# Altium PCB PCB1.PcbDoc
Units mil, origin at the board's own origin, x right, y up, seen from the top; angles counter-clockwise.
Board outline 2755.91 x 2755.91 mil, 2 copper layers (Top Layer, Bottom Layer); 57 components, 61 nets, 243 pads, 102 vias.
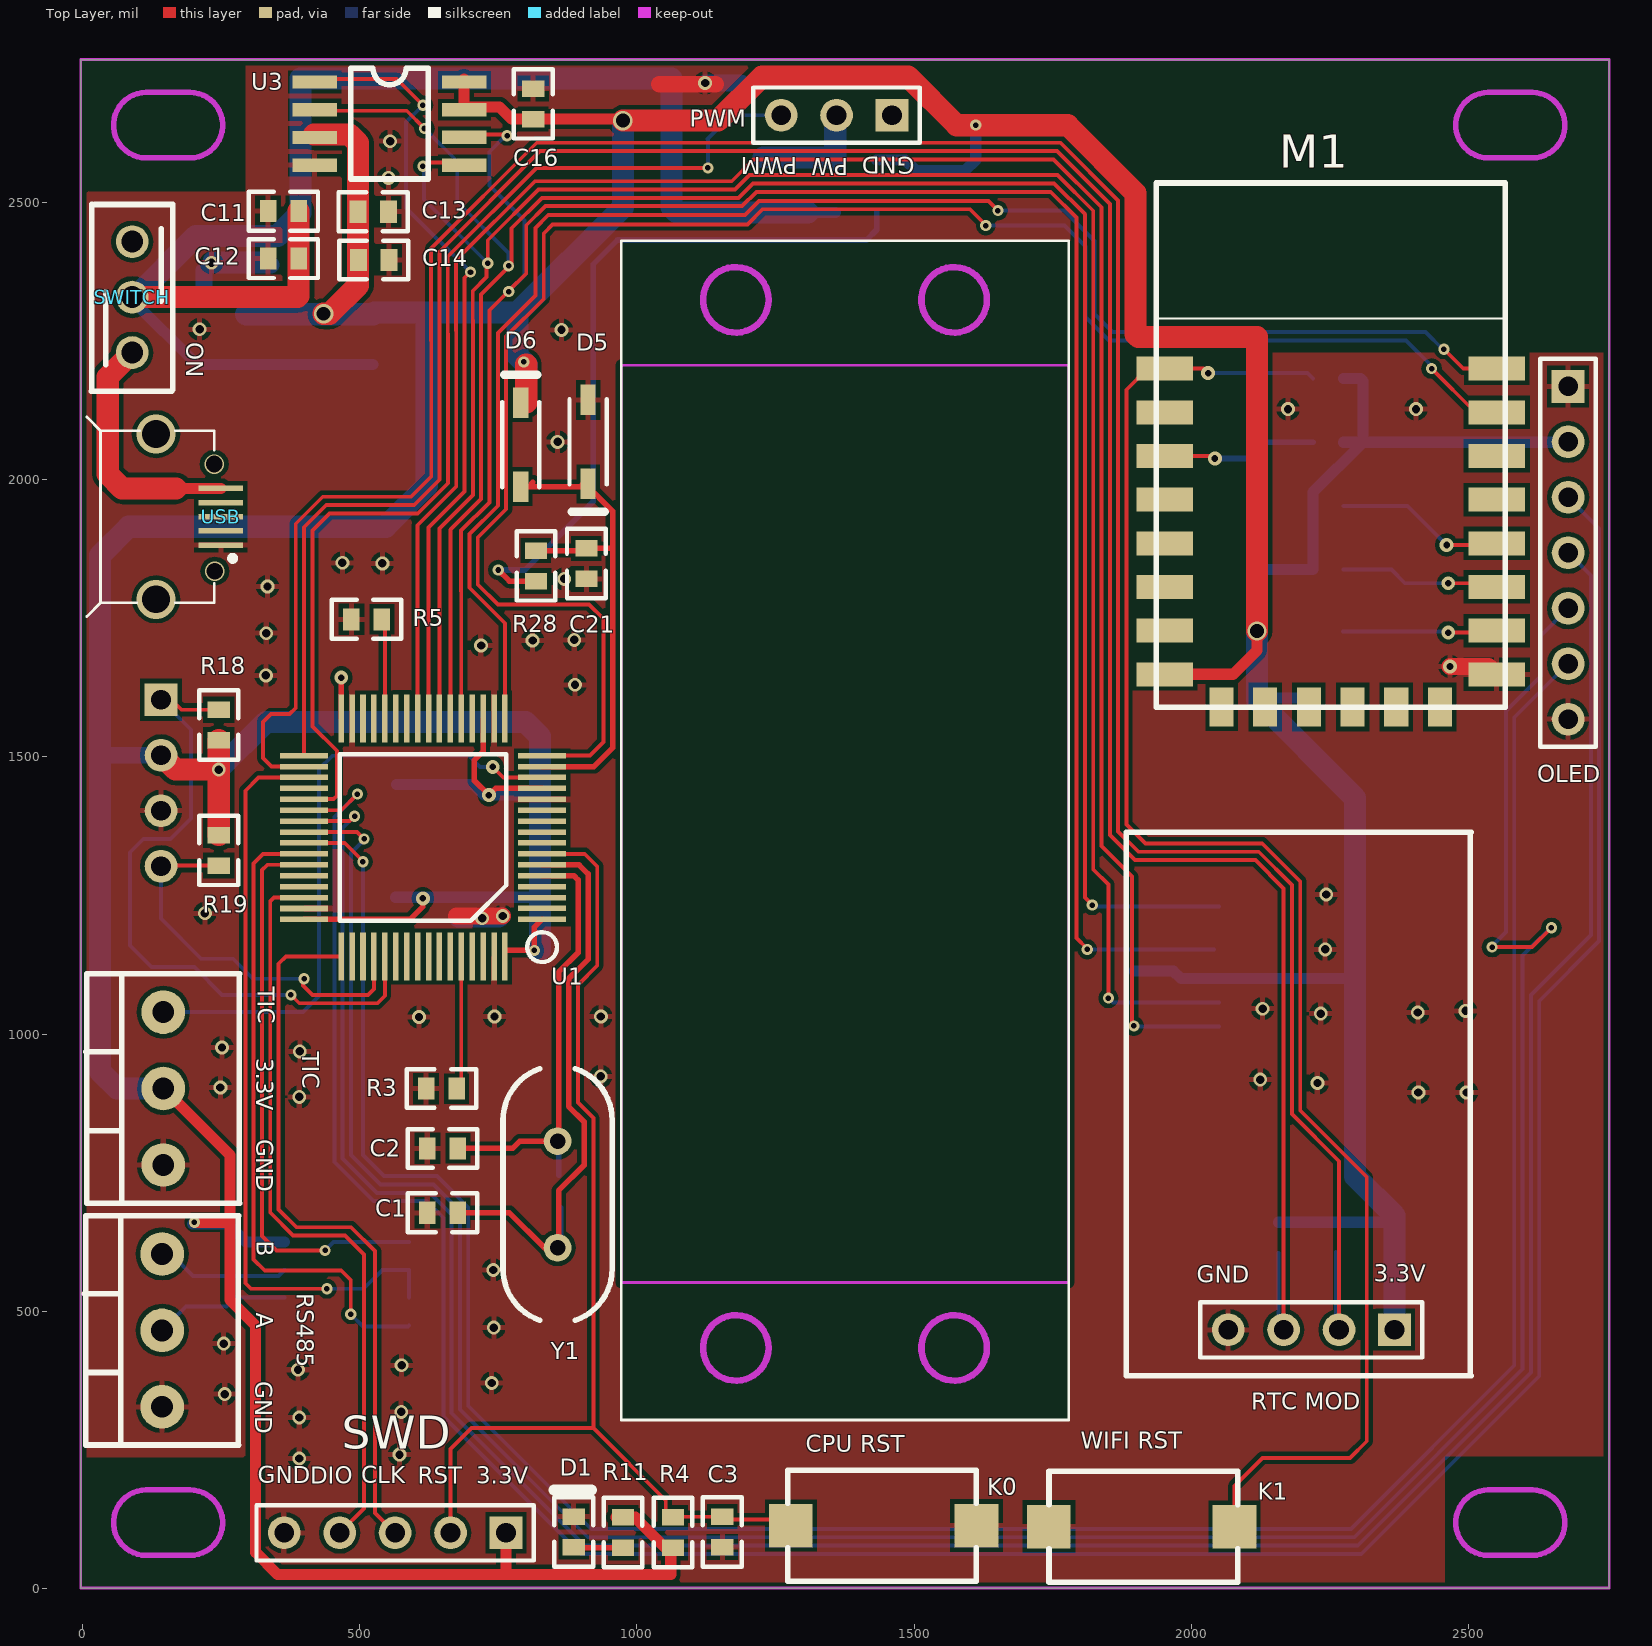
[diagram p0: Top Layer view]
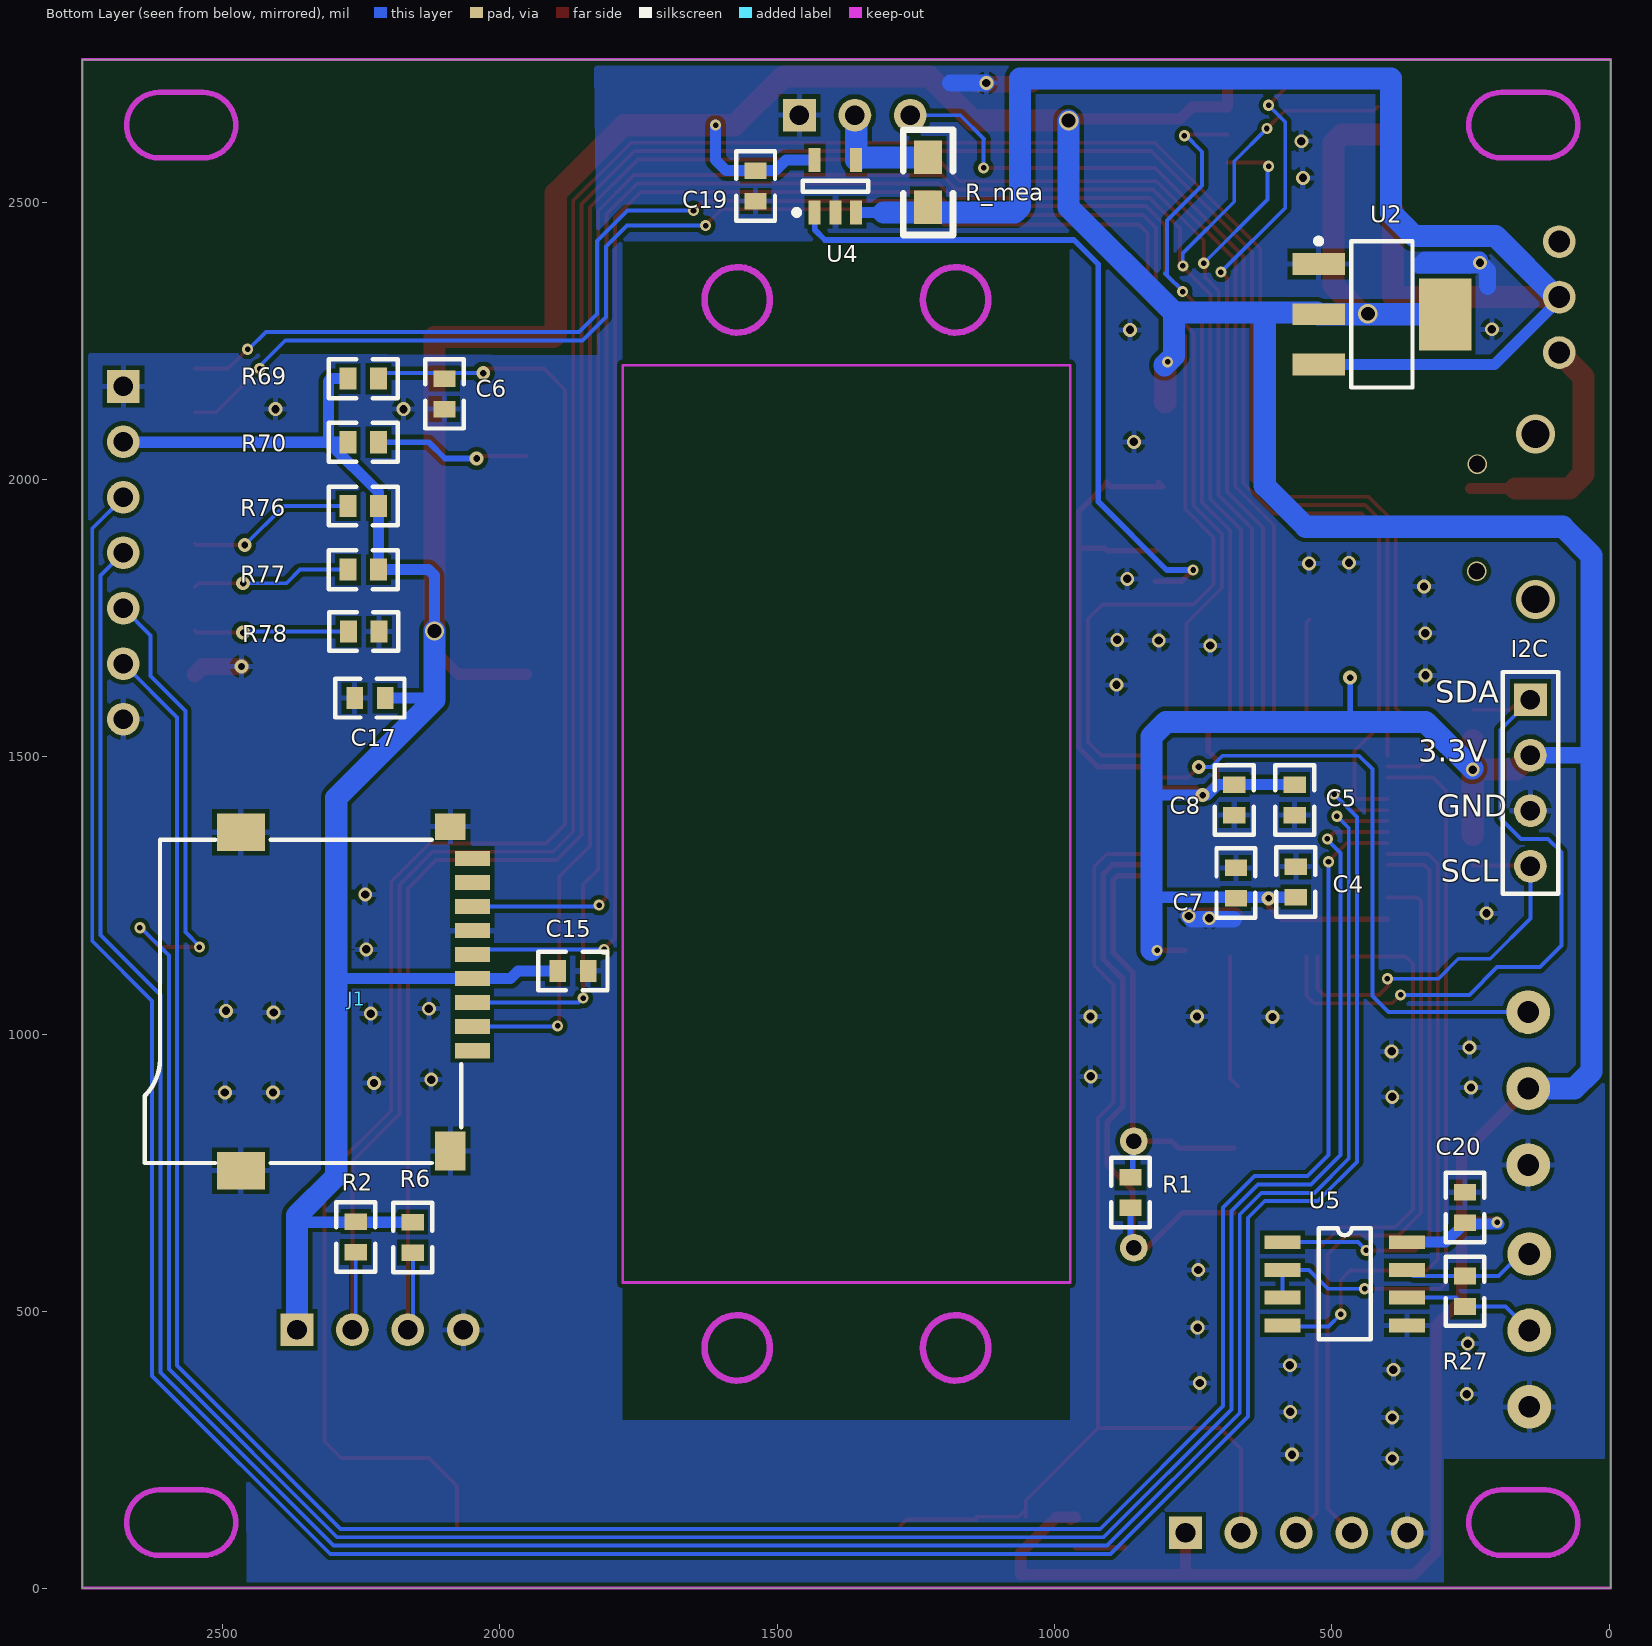
[diagram p1: Bottom Layer view, seen from below]

## Layer stack, top to bottom
Top Layer: signal copper 1.4
Dielectric: dielectric 12.6, FR-4, Dk 4.8
Bottom Layer: signal copper 1.4

## Board outline
-2.79,1.32 -2.79,2757.23 2753.12,2757.23 2753.12,1.32

## Design rules (kind name [scope] priority, off if disabled: settings)
Clearance [All] p1: gap=8
ComponentClearance [All] p1: gap=3.94 collisioncheckmode=3 verticalgap=3.94 showdistances=FALSE
FabricationTestPointUsage TestPointUsage [All] p1: valid=0 allowmultiple=FALSE
FabricationTestpoint Testpoint [All] p1: side=3 testpointundercomponent=TRUE minsize=40 maxsize=100 preferedsize=60 minholesize=0 maxholesize=40 preferedholesize=32 testpointgrid=1 allowsidetop=TRUE allowsidebottom=TRUE usegrid=TRUE gridtolerance=0.01
HoleToHoleClearance [All] p1: gap=0 allowstackedmicrovias=TRUE
MinimumSolderMaskSliver [All] p1: minsoldermaskwidth=0
PolygonConnect [All] p1: connectstyle=Relief reliefconductorwidth=10 reliefentries=4 polygonreliefangle="90 Angle"
RoutingVias [All] p1: holewidth=10 width=20 viastyle="Through Hole" minholewidth=6 minwidth=6 maxholewidth=30 maxwidth=50
SilkToSilkClearance [All] p1: silktosilkclearance=0
SilkscreenOverComponentPads [IsPad] p1: minsilkscreentomaskgap=0
SolderMaskExpansion [All] p1: expansion=4
Width [All] p1: maxlimit=100 minlimit=1 preferedwidth=10
21 further rules are at their usual default settings.

## Components (designator, comment, footprint, x,y, rotation, side; value= is the part's Value field where it differs from the comment)
C1 "Cap" 0603 622,794 r0 top
C2 "Cap" 0603 677,678 r180 top
C3 "Cap" 0603 1154,75 r90 top
C4 "Cap" 0603 565,1247 r90 bottom
C5 "Cap" 0603 567,1450 r270 bottom
C6 "Cap" 0603 2100,2182.06 r270 bottom
C7 "Cap" 0603 673,1245 r90 bottom
C8 "Cap" 0603 676,1450 r270 bottom
C11 "Cap" 0603 335,2484 r0 top
C12 "Cap" 0603 335,2398.5 r0 top
C13 "Cap" 0603 552,2483 r180 top
C14 "Cap" 0603 553,2396 r180 top
C15 "Cap" 0603 1841,1114 r0 bottom
C16 "Cap" 0603 813,2705 r270 top
C17 "Cap" 0603 2262,1606 r180 bottom
C19 "Cap" 0603 1539,2502 r90 bottom
C20 "Cap" 0603 260,715 r270 bottom
C21 "Cap" 0603 909,1876 r270 top
D1 "LED2" 0603 886,75 r90 top
D5 "SS14" IN5819 912,2068 r270 top
D6 "SS14" IN5819 790.5,2063 r90 top
I2C "Header 4" HDR1X4 142,1603 r270 bottom
J1 "SDCARD-M" SDCARD-M 2483,1059 r0 bottom
K0 "K1" sop2 1632,114 r180 top
K1 "K1" sop2 1723,112 r0 top
M1 "ESP-12E&F Module" "ESP-12E&F Module" 2251,1895 r180 top
OLED "Header 7" HDR1X7 2679,2168 r270 top
PWM "Header 3" HDR1X3 1460,2657 r180 top
R1 "Res2" 0603 863,687 r90 bottom
R2 "Res2" 0603 2260,662 r270 bottom
R3 "Res2" 0603 675,902 r180 top
R4 "Res2" 0603 1065,74 r90 top
R5 "Res2" 0603 485,1748 r0 top
R6 "Res2" 0603 2157,606 r90 bottom
R11 "Res2" 0603 975,74 r90 top
R18 "Res2" 0603 246,1530 r90 top
R19 "Res2" 0603 246,1304 r90 top
R27 "Res2" 0603 260,564 r270 bottom
R28 "Res2" 0603 818,1872 r270 top
R69 "Res2" 0603 2219,2182 r0 bottom
R70 "Res2" 0603 2219,2067.22 r0 bottom
R76 "Res2" 0603 2219,1952.44 r0 bottom
R77 "Res2" 0603 2219,1837.65 r0 bottom
R78 "Res2" 0603 2218,1726 r0 bottom
R_mea "Res2" 0805 1228,2581 r270 bottom
RS485 "Header 3" DZ3*3.5 144,466 r0 top
"RTC MOD" "DS3231时钟" HDR1X4 2366,467 r180 top
SWD "Header 5" HDR1X5 764,101 r180 top
SWITCH "Header 3" 12D00 90,2329 r270 top
TIC "Header 3" DZ3*3.5 146,902 r0 top
U1 "STM32F103RCT6" LQFP64 829,1207 r180 top
U2 "LM1117" MP04A_N 410,2298 r180 bottom
U3 "W25Q64" SOIC-8 419,2717 r0 top
U4 "ina194" ina194 1395,2529 r90 bottom
U5 "SP3485" SOP-8 589,625 r180 bottom
USB "usb" Micro_USB 234,1933 r180 top
Y1 "8MHz" XTAL_US 857,615 r90 top

## Footprints (in the part's own frame and the unit in brackets; to place one, negate y for a bottom-side part, rotate by r counter-clockwise, add the part's x,y. Pads: shape width x height; smd on the part's side, far side on the other; paste and mask are expansions set on the pad)
12D00 [mm]
  round 1.5 hole 1: 1(-2.54,0) 2(0,0) 3(2.54,0)
  silkscreen extent -4.25,-1.88 4.32,1.85
0603 [mil]
  rect 30x40 smd: 1(0,0) 2(55,0)
  silkscreen extent -35,-35 90,35
0805 [mil]
  rect 60x50 smd: 1(0,-0.06) 2(90,-0.06)
  silkscreen extent -50,-45 140,45
DZ3*3.5 [mm]
  round 2 hole 1: 1(0,-3.5) 2(0,0) 3(0,3.5)
  silkscreen extent -3.56,-5.26 3.5,5.25
"ESP-12E&F Module" [mm]
  rect 2.6x1.1 smd: 1(7.6,-7.75) 2(7.6,-5.75) 3(7.6,-3.75) 4(7.6,-1.75) 5(7.6,0.25) 6(7.6,2.25) 7(7.6,4.25) 8(7.6,6.25) 15(-7.6,6.25) 16(-7.6,4.25) 17(-7.6,2.25) 18(-7.6,0.25) 19(-7.6,-1.75) 20(-7.6,-3.75) 21(-7.6,-5.75) 22(-7.6,-7.75)
  rect 1.1x1.8 smd: 9(5,7.75) 10(3,7.75) 11(1,7.75) 12(-1,7.75) 13(-3,7.75) 14(-5,7.75)
  silkscreen extent -8,-16.25 8,7.75
HDR1X3 [mm] "Connector; Header; 3 Position"
  rect 1.5x1.5 hole 0.9: 1(0,0)
  round 1.5 hole 0.9: 2(2.54,0) 3(5.08,0)
  silkscreen extent -1.27,-1.27 6.35,1.27
HDR1X4 [mm] "Connector; Header; 4 Position"
  rect 1.5x1.5 hole 0.9: 1(0,0)
  round 1.5 hole 0.9: 2(2.54,0) 3(5.08,0) 4(7.62,0)
  silkscreen extent -1.27,-1.27 8.89,1.27
HDR1X5 [mm] "Connector; Header; 5 Position"
  rect 1.5x1.5 hole 0.9: 1(0,0)
  round 1.5 hole 0.9: 2(2.54,0) 3(5.08,0) 4(7.62,0) 5(10.16,0)
  silkscreen extent -1.27,-1.27 11.43,1.27
HDR1X7 [mm] "Connector; Header; 7 Position"
  rect 1.5x1.5 hole 0.9: 1(0,0)
  round 1.5 hole 0.9: 2(2.54,0) 3(5.08,0) 4(7.62,0) 5(10.16,0) 6(12.7,0) 7(15.24,0)
  silkscreen extent -1.27,-1.27 16.51,1.27
IN5819 [mm] "SBD"
  rect 1.4x0.7 smd: 1(-1.925,0) 2(1.925,0)
  silkscreen extent -1.95,-0.85 3.2,0.85, body extent -1.92,-0.85 1.92,0.85, height 1.1
ina194 [mm] "SOT23, 5-Leads, Body 3.0x3.0mm (max), Pitch 0.95mm, IPC Medium Density"
  rect 1.1x0.55 smd: 1(-1.2,0.95) 2(-1.2,0) 3(-1.2,-0.95) 4(1.2,-0.95) 5(1.2,0.95)
  silkscreen extent -1.32,-1.5 0.25,1.9, body extent -0.87,-1.52 0.87,1.53, height 1.45
LQFP64 [mm]
  rect 2.2x0.254 smd: 1(0,0) 2(0,-0.5) 3(0,-1) 4(0,-1.5) 5(0,-2) 6(0,-2.5) 7(0,-3) 8(0,-3.5) 9(0,-4) 10(0,-4.5) 11(0,-5) 12(0,-5.5) 13(0,-6) 14(0,-6.5) 15(0,-7) 16(0,-7.5) 33(10.9,-7.5) 34(10.9,-7) 35(10.9,-6.5) 36(10.9,-6) 37(10.9,-5.5) 38(10.9,-5) 39(10.9,-4.5) 40(10.9,-4) 41(10.9,-3.5) 42(10.9,-3) 43(10.9,-2.5) 44(10.9,-2) 45(10.9,-1.5) 46(10.9,-1) 47(10.9,-0.5) 48(10.9,0)
  rect 0.254x2.2 smd: 17(1.7,-9.2) 18(2.2,-9.2) 19(2.7,-9.2) 20(3.2,-9.2) 21(3.7,-9.2) 22(4.2,-9.2) 23(4.7,-9.2) 24(5.2,-9.2) 25(5.7,-9.2) 26(6.2,-9.2) 27(6.7,-9.2) 28(7.2,-9.2) 29(7.7,-9.2) 30(8.2,-9.2) 31(8.7,-9.2) 32(9.2,-9.2) 49(9.2,1.7) 50(8.7,1.7) 51(8.2,1.7) 52(7.7,1.7) 53(7.2,1.7) 54(6.7,1.7) 55(6.2,1.7) 56(5.7,1.7) 57(5.2,1.7) 58(4.7,1.7) 59(4.2,1.7) 60(3.7,1.7) 61(3.2,1.7) 62(2.7,1.7) 63(2.2,1.7) 64(1.7,1.7)
  silkscreen extent -0.68,-7.56 9.26,1.95
Micro_USB [mm] "5P 贴?"
  rect 2.032x0.25 smd: 1(-0.402,-1.3) 2(-0.402,-0.65) 3(-0.402,0) 4(-0.402,0.65) 5(-0.402,1.3)
  silkscreen extent -1.07,-4.57 5.74,4.57
MP04A_N [mm]
  rect 2.4x1 smd: 1(-2.894,2.3) 2(-2.894,0) 3(-2.894,-2.3)
  rect 2.4x3.3 smd: 4(2.906,0)
  silkscreen extent -3.02,-3.35 1.41,3.47
SDCARD-M [mm]
  rect 1.6x0.7 smd: 1(-11.008,2.25) 2(-11.008,1.15) 3(-11.008,0.05) 4(-11.008,-1.05) 5(-11.008,-2.15) 6(-11.008,-3.25) 7(-11.008,-4.35) 8(-11.008,-5.45) 9(-11.008,-6.55)
  rect 1.4x1.2 smd: 10(-10,-8.004)
  rect 2.2x1.7 smd: 11(-0.4,-7.75) 13(-0.4,7.75)
  rect 1.4x1.8 smd: 12(-10,6.85)
  silkscreen extent -10.5,-7.4 4,7.4
SOIC-8 [mil]
  rect 80x24 smd: 1(0,0) 2(0,-50.06) 3(0,-100.06) 4(0,-150.06) 5(270,-150) 6(270,-100) 7(270,-50) 8(270,0)
  silkscreen extent 65,-175 205,25
sop2 [mm]
  rect 2x2 smd: 1(0.5,0) 2(9,0)
  silkscreen extent 0.51,-2.54 9.14,2.54
SOP-8 [mil]
  rect 65x25 smd: 1(0,0) 2(0,-50) 3(0,-100) 4(0,-150) 5(224.41,-150) 6(224.41,-100) 7(224.41,-50) 8(224.41,0)
  silkscreen extent 65,-175 159,25
XTAL_US [mil]
  round 50 hole 28: 1(0,0) 2(192.13,0)
  silkscreen extent -131,-98 323,98

## Part data
C1 C2 C3 C4 C5 C6 C7 C8 C11 C12 C13 C14 C15 C16 C17 C19 C20 C21: "Capacitor"
D1: "Typical RED, GREEN, YELLOW, AMBER GaAs LED"
D5 D6: library part "Diode 1N4007", "1 Amp General Purpose Rectifier"
I2C: "Header, 4-Pin"
J1: library part SDCAR, "TF卡?"
K0 K1: library part KEY
OLED: "Header, 7-Pin"
PWM RS485 SWITCH TIC: "Header, 3-Pin"
R1 R2 R3 R4 R5 R6 R11 R18 R19 R27 R28 R_mea: "Resistor"
R69 R70 R76 R77 R78: library part RES
"RTC MOD": library part "Header 4", "Header, 4-Pin"
SWD: "Header, 5-Pin"
U1: library part STM32F103RBT6, "STM32 ARM-based 32-bit MCU with 128 Kbytes Flash, 64-pin LQFP, Industrial Temperature"
U2: "800mA LDO"
U3: library part W25X16, "W25X16;SST25VF016;MX25L1605"
U5: library part MAX3485
Y1: library part XTAL, "Crystal Oscillator"

## Via types
v1: diameter 25, hole 15, Top Layer to Bottom Layer, tented both sides, 52 vias
v2: diameter 20, hole 10, Top Layer to Bottom Layer, tented both sides, 33 vias
v3: diameter 25, hole 12, Top Layer to Bottom Layer, tented both sides, 10 vias
v4: diameter 35, hole 25, Top Layer to Bottom Layer, tented both sides, 3 vias
v5: diameter 35, hole 30, Top Layer to Bottom Layer, tented both sides, 2 vias
v6: diameter 70, hole 50, Top Layer to Bottom Layer, tented both sides, 2 vias

## Nets (pads, with @x,y where several pads share a name; then routed paths per layer and width w, separated by ;. In a path a pad name is that pad's centre, name@x,y a point inside that pad or via, vN(x,y) a via of type N, cw(c..) or ccw(c..) an arc to the next point about the centre after c; other vN are vias at no path point)
AN8: U1.26
AN9: U1.27
AN10: U1.8
AN11: U1.9
AN12: U1.10
AN13: U1.11
D+: U1.45
D-: U1.44
ESP_RESET: C6.1 K1.2 M1.1 R69.1 | length 2903.7
  Top Layer w7: v3(2030,2192) 2021.88,2200.12 M1.1 1920.83,2200.12 1882.71,2162 1882.71,1378.29 1917,1344 2127.43,1344 2196,1275.43 2196,862.21 2316,742.21 2316,266 2286,236 2128,236 2077.33,185.33 K1.2
  Bottom Layer w7: v3(2030,2192) 2209.06,2192 R69.1@2219,2182.06
F_CS: U1.24 U3.1 | length 1413.9
  Top Layer w7: U3.1@418,2722 567,2722 v2(614,2675) ; U1.24 624.28,1913.49 689.21,1978.43 689.21,2281.15 689,2281.36 689,2364 699,2374 v2(700,2374)
  Bottom Layer w7: v2(614,2675) 584,2645 584,2490 v2(700,2374)
GND: "RTC MOD.4" C1.1 C2.2 C3.1 C4.2 C5.2 C6.2 C7.2 C8.2 C11.1 C12.1 C13.1 C14.1 C15.1 C16.1 C17.1 C19.1 C20.1 C21.2 D1.2 D5.1 I2C.3 J1.6 J1.10 J1.11 J1.12 J1.13 K0.1 K1.1 M1.15 OLED.1 OLED.7 PWM.1 R3.2 R5.1 R78.1 RS485.1 SWD.5 TIC.1 U1.12 U1.18 U1.31 U1.47 U1.63 U2.1 U3.4 U4.2 U5.5 USB.5 | length 693
  Top Layer w30: 674,1213 v1(758,1213) ; 1040,2713 1141.95,2713 ; v3(2466,1663) 2536.15,1663 M1.15
  Bottom Layer w30: 219,2348 219.42,2348.42 219.42,2377.42 v1(233,2391) ; v1@233,2387 341,2387 332,2396 v1@233,2396 ; 677,1207 752,1207 v1(758,1213) ; v1(1123,2715) 1188,2715
  other v1: 391.15,235 572,242 391.15,309 575,319 256.83,351 738.22,371 389,395 575.73,403 255,442.11 742,471 741,575 391.15,887 2409,895 2496,895 248.95,904 2227,912 2123.93,918 934.77,924 392.19,969 252,976 607,1031 743.22,1032 935,1032 2233,1037 2408,1039 2494,1042 2128.15,1046 2241,1152.9 721,1209 221,1218 2242.82,1252 888.32,1630 331,1647 719.21,1701 812,1710 887,1711 331.71,1723 334,1807.21 869,1821 541,1849 469,1850 857,2068 2174,2127 2404.72,2127 864,2270 211.56,2271 552,2544.02 555,2610.14
I2C_SCL: I2C.4 R19.1 U1.52 | length 708.8
  Top Layer w7: I2C.4 143,1304 R19.1 ; v2@398,1097 398,1088 415.15,1070.85 515,1070.85 525.85,1081.7 U1.52
  Bottom Layer w7: I2C.4 142,1208.31 214.31,1136 272,1136 308,1100 v2(400,1100)
I2C_SDA: I2C.1 R18.2 U1.53 | length 1252.7
  Top Layer w7: I2C.1@147,1616.69 178.69,1585 R18.2 ; v2@373,1074 v2(376,1071) 391.15,1055.85 532.07,1055.85 545.53,1069.32 U1.53
  Bottom Layer w7: I2C.1 196,1549 196,1389 159,1352 110,1352 86,1328 86,1160 125,1121 202,1121 252,1071 v2(376,1071) ; I2C.1@147,1599 I2C.1@147,1616.69
I_AD: C21.1 D5.2 D6.1 R28.1 U1.15 | length 895.9
  Top Layer w10: 812.6,1995.21 804.39,1987 897.79,1987 906,1995.21 907,1995.21 D5.2@907,1992 ; R28.1 905,1872 C21.1 953.12,1876 ; U1.15 922.59,1482.59 956.12,1516.12 956.12,1942.88 D5.2@907,1992 ; D5.2@906,1992.21 D5.2@907,1992
I_MEA: R28.2 U4.1 | length 1294.8
  Top Layer w10: v2(750,1837) 770,1817 R28.2
  Bottom Layer w10: v2(750,1837) 798,1837 921,1960 921,2388 965,2432 1414,2432 1432.4,2450.4 U4.1
JNTRST: U1.56
JTCK/SWCLK: SWD.3 U1.49 | length 1288.9
  Top Layer w7: U1.49 367.07,1140.07 354,1127 354,684.21 386.21,652 484.8,652 528,608.8 528,137 SWD.3
JTDO: U1.55
JTMS/SWDIO: SWD.4 U1.46 | length 1345.8
  Top Layer w7: U1.46 345.37,1246.37 339,1240 339,678 380,637 474,637 508,603 508,145 SWD.4
NetC1_2: C1.2 R1.2 U1.5 Y1.2 | length 804.1
  Top Layer w10: C1.2 776,794 789.13,807.13 Y1.2 859,807.13 859,1112 893.9,1146.9 893.9,1278.1 886.26,1285.74 U1.5
  Bottom Layer w10: Y1.2 859,807.13 R1.2@859,746
NetC2_1: C2.1 R1.1 U1.6 Y1.1 | length 1085
  Top Layer w10: C2.1 770,678 833,615 Y1.1 859,615 859,718 905,764 905,842 877,870 877,1100 911.9,1134.9 911.9,1289.1 895.58,1305.42 U1.6
  Bottom Layer w10: Y1.1@863,619 R1.1
NetD1_1: D1.1 R11.1 | length 89.4
  Top Layer w10: D1.1@873,75 874,74 R11.1@962,74
NetM1_3: M1.3 R70.1 | length 281.3
  Top Layer w7: M1.3 2037.36,2042.64 v3(2042,2038)
  Bottom Layer w10: v3(2042,2038) 2099,2038 2128.28,2067.28 R70.1@2219,2067.28
NetM1_16: M1.16 R78.2 | length 279.6
  Top Layer w7: v3(2463,1724) 2546.54,1724 M1.16
  Bottom Layer w7: R78.2 2273.06,1726.06 2460.94,1726.06 v3(2463,1724)
NetM1_17: M1.17 R77.2 | length 289.2
  Top Layer w7: v3(2463,1813) 2543.63,1813 M1.17
  Bottom Layer w7: R77.2 2274.06,1837.72 2360.28,1837.72 2385,1813 v3(2463,1813)
NetM1_18: M1.18 R76.2 | length 306.8
  Top Layer w7: v3(2460,1882) 2547.06,1882 M1.18
  Bottom Layer w7: R76.2 2274.06,1952.5 2389.5,1952.5 v3(2460,1882)
NetPWM_2: PWM.2 R_mea.1 U4.4 | length 218.3
  Bottom Layer w10: U4.4@1352.84,2576.24 U4.4
  Bottom Layer w40: R_mea.1 U4.4@1352.84,2581 ; U4.4 PWM.2@1357.6,2665
NetR3_1: R3.1 U1.60 | length 240
  Top Layer w7: R3.1@669,906 670,907 683.33,920.33 U1.60
NetR5_2: R5.2 U1.28 | length 181.1
  Top Layer w7: R5.2 545.54,1742.46 U1.28
NetSWITCH_3: SWITCH.3 USB.1 | length 451.7
  Top Layer w20: 169,1984.18 USB.1
  Top Layer w40: SWITCH.3 46,2185 46,2010 71.82,1984.18 169,1984.18
OLED_DC: OLED.6 U1.41 | length 4642.6
  Top Layer w7: U1.41 473.21,1344.79 506.5,1311.5 v2(506,1311)
  Bottom Layer w7: v2(506,1311) 506,782 544,744 639.64,744 696,687.64 696,329.64 917.64,108 2287.36,108 2581.97,402.61 2581.97,1570.97 OLED.6
OLED_RST: OLED.5 U1.40 | length 5028.3
  Top Layer w7: U1.40 495.52,1364.48 v2(508,1352) ; v2(2542,1157) 2614,1157 v2(2649,1192)
  Bottom Layer w7: v2(508,1352) 508,1349.91 484.5,1326.41 484.5,782.29 537.79,729 633.43,729 681,681.43 681,323.43 911.43,93 2293.57,93 2596.97,396.4 2596.97,1141.97 v2@2647,1192 ; v2@2543,1160 2566.97,1183.97 2566.97,1582.97 2630,1646 2630,1719 OLED.5
OLED_SCL: OLED.3 U1.38 | length 5248.5
  Top Layer w7: U1.38 466.85,1403.85 v2(496,1433)
  Bottom Layer w7: v2(496,1433) 454.5,1391.5 454.5,769.86 525.36,699 621,699 651,669 651,311 899,63 2306,63 2626.97,383.97 2626.97,1059.97 2735.03,1168.03 2735.03,1911.97 OLED.3
OLED_SDA: OLED.4 U1.39 | length 5030.8
  Top Layer w7: U1.39 482.17,1384.17 v2(491,1393)
  Bottom Layer w7: v2(491,1393) 469.5,1371.5 469.5,776.07 531.57,714 627.21,714 666,675.21 666,317.21 905.21,78 2299.79,78 2611.97,390.19 2611.97,1070.97 2720.03,1179.03 2720.03,1826.97 OLED.4
PB5: U1.57
PB6: U1.58
PB7: U1.59
PB8: U1.61
PB9: U1.62
PC10: U1.51
PD2: U1.54
PWM: PWM.3 U1.37 | length 1980.9
  Top Layer w7: U1.37 400.33,1424 453,1424 459,1430 459,1511 414.87,1555.13 414.87,1907.87 446,1939 604.79,1939 659.21,1993.43 659.21,2262.57 659,2262.79 659,2402 819,2562 v2(1128,2562)
  Bottom Layer w7: v2(1128,2562) 1128,2613 1127,2614 1170,2657 PWM.3@1256,2657
RESET: C3.2 K0.2 R4.2 SWD.2 U1.7 | length 2022.4
  Top Layer w7: SWD.2 664,252.27 701.73,290 921.5,290 ; U1.7 905.89,1325.11 928.4,1302.6 928.4,1123.9 893.5,1089 893.5,876.83 921.5,848.83 921.5,290 ; R4.2@1052,129 R4.2@1052,143 ; C3.2@1141,125 1266.67,125 K0.2 ; C3.2@1141,130 1065,130 1059,136 R4.2@1052,143 ; 921.5,290 1052,159.5 R4.2@1052,143
RS485_A: R27.2 RS485.2 U5.6 | length 233.7
  Bottom Layer w7: RS485.2@152,474 187,509 R27.2 276,525 U5.6
RS485_B: R27.1 RS485.3 U5.7 | length 236.9
  Bottom Layer w7: RS485.3@152,611.8 199.8,564 R27.1 353.59,564 U5.7
RS485_RE: U1.35 U5.2 U5.3 | length 1367
  Top Layer w7: U1.35 317.91,1462.91 294,1439 294,551 304,541 v2(441,541)
  Bottom Layer w7: v2(441,541) 507,541 541,575 U5.2 U5.3
RS485_RX: U1.43 U5.1 | length 1021.7
  Top Layer w7: U1.43 333.42,1305.42 324,1296 324,636 349.89,610.11 v2(437.89,610.11)
  Bottom Layer w7: v2(437.89,610.11) 452.79,625 U5.1
RS485_TX: U1.42 U5.4 | length 1179.2
  Top Layer w7: U1.42 326.11,1325.11 309,1308 309,594 329,574 467,574 484,557 v2(484,495)
  Bottom Layer w7: v2(484,495) 506,473 587,473 U5.4
RTC_SCL: "RTC MOD.2" R2.2 U1.34 | length 5071.4
  Top Layer w7: U1.34 341.41,1482.59 326,1498 326,1563 340,1577 373.87,1577 384.87,1588 384.87,1920.29 433.57,1969 592.36,1969 629.21,2005.85 629.21,2250.15 629,2250.36 629,2417 819.39,2607.39 1763.67,2607.39 1867.71,2503.36 1867.71,1365.51 1904.21,1329 2121.21,1329 2181,1269.21 2181,856 2266,771 2266,467 2268,467
  Bottom Layer w7: R2.2 2260,473 2266,467
RTC_SDA: "RTC MOD.3" R6.1 U1.33 | length 4856
  Top Layer w7: U1.33 399.87,1914.08 439.79,1954 598.57,1954 644.21,1999.64 644.21,2256.36 644,2256.57 644,2410.79 825.61,2592.39 1757.46,2592.39 1852.71,2497.14 1852.71,1359.29 1898,1314 2115,1314 2166,1263 2166,467
  Bottom Layer w7: R6.1 2157,476 2166,467
RX2: M1.22 U1.17 | length 2914.2
  Top Layer w7: U1.17 762.07,1740.93 698.11,1804.89 698.11,1901.68 749.21,1952.79 749.21,2264.21 817,2332 817,2453.93 840.07,2477 1194.85,2477 1220.25,2502.39 1633.61,2502.39 v2(1651,2485) ; v2(2455,2235) 2489.88,2200.12 M1.22
  Bottom Layer w7: v2(1651,2485) 1770,2485 1825,2430 1825,2298.21 1857.21,2266 2422,2266 v2@2453,2235
RX3: U1.30
SD_CS: J1.2 U1.25 | length 3780.4
  Top Layer w7: U1.25 604.59,1917.59 674.21,1987.21 674.21,2268.79 674,2269 674,2395.79 816.21,2538 1171,2538 1210.39,2577.39 1751.25,2577.39 1837.71,2490.93 1837.71,1339.29 1893,1284 v2@1893,1016
  Bottom Layer w7: v2@1897.28,1013.72 J1.2
  other v2: 1896,1015
SPI1_MISO: J1.7 U1.22 U3.2 | length 4025.6
  Top Layer w7: U3.2@418,2671.94 424.94,2665 585,2665 v2(617,2633) ; U1.22 663.65,1909.65 719.21,1965.21 719.21,2293.57 719,2293.79 719,2334 v2@768.5,2383.5 ; v2@1821,1233 1807.71,1246.29 1807.71,2478.51 1752.37,2533.84 1209.27,2533.84 1183.43,2508 828.64,2508 773.73,2453.09 773.73,2389.19 v2@769.45,2384.53 ; v2@768.5,2383.5 v2@769.45,2384.53 ; v2@768.5,2383.5 v2(768.73,2385.19) v2@769.45,2384.53
  Bottom Layer w7: v2(617,2633) 676,2574 676,2501 768.73,2408.27 v2(768.73,2385.19) ; v2@1823.42,1230.26 J1.7
  other v2: 1821,1232.68
SPI1_MOSI: J1.3 U1.23 U3.5 | length 3989.8
  Top Layer w7: v2(614,2565) 621,2572 U3.5@688,2572 ; U1.23 643.96,1911.96 704.21,1972.21 704.21,2287.36 704,2287.57 704,2340.21 729,2365.21 729,2390 v2(731,2390) 731,2431.57 822.43,2523 1177.21,2523 1203.06,2548.84 1758.58,2548.84 1822.71,2484.72 1822.71,1297.29 1850,1270 v2(1850,1065)
  Bottom Layer w7: v2@616,2566 616,2505 v2(731,2390) ; 1857.97,1057.03 J1.3
SPI1_SCK: J1.5 U1.21 U3.6 | length 4034
  Top Layer w7: U1.21 683.33,1798.45 683.11,1798.68 683.11,1907.89 734.21,1959 734.21,2305.21 800.5,2371.5 ; U3.6@688,2622 v2@764,2622 ; v2@766.73,2338.19 768.28,2339.73 800.5,2371.5 ; v2@1812,1154 1792.71,1173.29 1792.71,2472.29 1746.16,2518.84 1215.48,2518.84 1189.64,2493 834.85,2493 800.5,2458.65 800.5,2371.5
  Bottom Layer w7: v2@764,2621 734,2591 734,2530 797,2467 797,2368.47 766.73,2338.19 768.28,2339.73 797.21,2368.26 800.5,2371.5 ; v2(1812,1152.9) J1.5@2040.36,1152.9
  other v2: 769,2339 766,2620
TIC: TIC.3 U1.14 | length 1130.4
  Top Layer w7: v3(740,1482) 759.1,1462.9 U1.14
  Bottom Layer w7: TIC.3 398,1039.8 427,1068.8 427,1478 451,1502 697,1502 717,1482 v3(740,1482)
TX2: M1.21 U1.16 | length 3238.5
  Top Layer w7: U1.16 915.08,1502.27 939.62,1526.81 939.62,1749 913.62,1775 749.21,1775 713.11,1811.11 713.11,1895.47 764.21,1946.57 764.21,2258 832,2325.79 832,2444 848,2460 1199.07,2460 1226.46,2487.39 1600.61,2487.39 v2@1629,2459 ; v2(2433,2200) 2511.62,2121.38 M1.21
  Bottom Layer w7: v2(1629,2458) 1771,2458 1809,2420 1809,2293 1851,2251 2387,2251 v2@2434,2204
TX3: U1.29
VCC3.3: "RTC MOD.1" C4.1 C5.1 C7.1 C8.1 C13.2 C14.2 C15.2 C16.2 C17.2 C19.2 C20.2 D6.2 I2C.2 J1.4 M1.8 OLED.2 R2.1 R4.1 R6.2 R11.2 R18.1 R19.2 R69.2 R70.2 R76.1 R77.1 SWD.1 TIC.2 U1.1 U1.13 U1.19 U1.32 U1.48 U1.64 U2.2 U2.4 U3.3 U3.7 U3.8 U4.5 U5.8 | length 14323.3
  Top Layer w10: U1.48 591,1207 614,1230 v3(614,1245) ; U1.32 v3@466.8,1643.2 ; U1.19 722.7,1510 707,1494.3 707,1457 v3(733,1431) 745.22,1443.22 U1.13 ; U1.64@764.93,1151 v2(815,1151) 815,1193 U1.1
  Top Layer w20: TIC.2 266,782 266,661 ; v2(202,661) 266,661 ; U3.8@688,2722 688,2672 752,2672 774,2650 C16.2 v4@972,2650 ; SWD.1 764,27.93 762.07,26 ; R11.2@962,129 967.46,129 R11.2@971.23,125.23 ; R11.2 997,129 1061,65 1061,26 762.07,26 ; M1.8 2074.94,1648.94 2118,1692 v4(2118,1727) ; 266,661 266,521 312,475 312,66 352,26 762.07,26
  Top Layer w40: I2C.2 168,1477 v1(246,1477) ; R19.2 v1(246,1477) ; R18.1 v1(246,1477) ; U3.3@418,2621.94 482.06,2621.94 497,2607 C13.2 497,2350 446,2299 v4(435,2299) ; D6.2@800.5,2138.79 v2@800.5,2207.55 ; v4(974.74,2647.26) 1146.47,2647.26 1225.94,2726.73 1488.93,2726.73 1576.76,2638.89 1776.72,2638.89 1899.21,2516.41 1899.21,2262 1904.21,2257 2118,2257 v4(2118,1727)
  Bottom Layer w10: 467,1564 v3(467,1643) ; 822,1247 825,1250
  Bottom Layer w20: v2@199,658 262,658 295,625 U5.8 ; C4.1 822,1247 ; C5.1 C8.1 706.5,1450 706.5,1449.37 724.37,1431.5 824.5,1431.5 825,1432 ; U4.5 1483.76,2576.24 1503,2557 C19.2 1592,2557 1611,2576 v2(1611,2639) ; C15.2 1967,1114 1980.66,1100.34 J1.4 2289.66,1100.34 2295,1095 ; v4(2118,1727) 2118,1827 2128.72,1837.72 R77.1 R76.1 2219,1977.28 2309,2067.28 ; 2121,1606 C17.2 ; R6.2 2354,661 2366,673 ; R69.2 2305,2182 2309,2178 2309,2067.28 ; R70.2@2274.06,2067.28 2309,2067.28 ; OLED.2 2678.28,2067.28 2309,2067.28
  Bottom Layer w30: 38,1503 I2C.2
  Bottom Layer w40: TIC.2 63,902 32,933 32,1863.29 83.71,1915 547,1915 621,1989 621,2301 ; v1@246.9,1478.9 331,1563 799,1563 825,1537 825,1432 825,1250 825,1152 ; U2.4 U2.2 526.95,2301 621,2301 ; v2@802,2206.05 v2(796,2212.05) 784.74,2223.31 784.74,2301 ; v4(974.74,2647.26) 974.74,2491 784.74,2301 ; v4(2118,1727) 2118,1603 2295,1426 2295,1095 2295,744 2366,673 2366,467 ; 621,2301 784.74,2301
VCC5V: C11.2 C12.2 R_mea.2 SWITCH.2 U2.3 U4.3 | length 2749.6
  Top Layer w40: SWITCH.2 388,2329 ; 390,2331 C12.2 C11.2
  Bottom Layer w20: SWITCH.2 90,2324 206.55,2207.45 U2.3 ; 1308,2481.76 U4.3
  Bottom Layer w40: SWITCH.2@90,2324 205,2439 352,2439 393.45,2480.45 393.45,2723.45 1062.55,2723.45 1062.55,2491.45 1072.24,2481.76 1308,2481.76
pads on no net: J1.1 J1.8 J1.9 M1.2 M1.4 M1.5 M1.6 M1.7 M1.9 M1.10 M1.11 M1.12 M1.13 M1.14 M1.19 M1.20 SWITCH.1 U1.2 U1.3 U1.4 U1.20 U1.36 U1.50 USB.2 USB.3 USB.4
copper on no net:
  other v5: 239,1835 238,2028
  other v6: 133,1784 133,2082

## Polygon pours and split planes (outlines as drawn)
GND on Bottom Layer "Top Layer-No Net" (solid, remove dead copper, pour order 5): -8.84,2756.13 2747.06,2756.13 2747.06,0.23 -8.84,0.23
GND on Top Layer "Top Layer-No Net" (solid, remove dead copper, pour order 4): -5,2759.2 2750.91,2759.2 2750.91,3.29 2699.79,3.29 -5,3.29

## Keep-outs
Keep-Out Layer:
  circle w11.81: c1178.32,2324.16 r59.06
  circle w11.81: c1572.02,2324.16 r59.06
  circle w11.81: c1178.32,434.39 r59.06
  circle w11.81: c1572.02,434.39 r59.06
  lines w5: -2.79,1.32 -2.79,2757.23 2753.12,2757.23 2753.12,1.32 -2.79,1.32 ; 971.62,552.5 971.62,2206.05 1778.71,2206.05 1778.71,552.5 971.62,552.5
  lines w10: 115.32,60.38 cw(c115.32,119.43) 115.32,178.49 194.06,178.49 cw(c194.06,119.43) 194.06,60.38 115.32,60.38 ; 115.32,2580.06 cw(c115.32,2639.12) 115.32,2698.17 194.06,2698.17 cw(c194.06,2639.12) 194.06,2580.06 115.32,2580.06 ; 2535.37,60.38 cw(c2535.37,119.43) 2535.37,178.49 2614.11,178.49 cw(c2614.11,119.43) 2614.11,60.38 2535.37,60.38 ; 2535.37,2580.06 cw(c2535.37,2639.12) 2535.37,2698.17 2614.11,2698.17 cw(c2614.11,2639.12) 2614.11,2580.06 2535.37,2580.06

## Other copper
Top Layer:
  pour cut-out: 971.62,2429 973.62,2431 1778.71,2431 1778.71,303 1775.71,306 972,306
  pour cut-out: -2.79,237 290,237 292,239 294,237 294,0 -2.79,1.32
  pour cut-out: 2456.21,239 2749,239 2751,241 2753,239 2753,2 2456.21,3.32
  pour cut-out: 1831,2760 2747,2755 2749,2757 2751,2755 2752,2229 1830,2229
  pour cut-out: -1.79,2756 291,2756 293,2758 295,2756 295,2519 -1.79,2520.32
Bottom Layer:
  pour cut-out: -2.79,2757.23 296,2757.23 295,2756.23 295,2521 -4,2521
  pour cut-out: 1830.02,2756.05 2752,2752.23 2751,2751.23 2757,2229 1824.02,2223.94
  pour cut-out: 2457.21,237.23 2756,237.23 2755,236.23 2755,1 2456,1
  pour cut-out: 0.21,234.23 299,234.23 298,233.23 298,-2 -1,-2
  pour cut-out: 973,2429 974,2430 1779,2430 1779,305 1778,304 972,304

## Silkscreen, mask and mechanical layers (free items; w line width, h text height)
Top Overlay:
  lines w5: 971.62,304.47 971.62,2430.46 1778.71,2430.46 1778.71,304.47 971.62,304.47
  lines w10: 2502.21,385.32 2502.21,1363.79 ; 2504,384 1881.95,384 1881.95,1364.32 2504,1364.32
  lines w20: 851,178 918,178
  text "GND" at 1501,2582 h30 r180
  text "PWM" at 1289,2581 h30 r180
  text "PW" at 1381,2579 h30 r180
  text "ON" at 187,2248 h30 r270
  text "TIC" at 316,1086 h30 r270
  text "3.3V" at 314,957 h30 r270
  text "GND" at 314,811 h30 r270
  text "B" at 315,628 h30 r270
  text "3.3V" at 2329,554 h30
  text "GND" at 2009,552 h30
  text "A" at 314,498 h30 r270
  text "GND" at 312,374 h30 r270
  text "WIFI RST" at 1800,253 h30
  text "CPU RST" at 1304,246 h30
  text "GND" at 316,190 h30
  text "CLK" at 503,190 h30
  text "DIO" at 411,189 h30
  text "RST" at 605,189 h30
  text "3.3V" at 710,189 h30
Bottom Overlay:
  text "SDA" at 314,1598 h40
  text "3.3V" at 344,1491 h40
  text "GND" at 310,1392 h40
  text "SCL" at 304,1275 h40